# EAGLE board NanoV3.2_panel (EAGLE 9.0.0), part 1 of 3
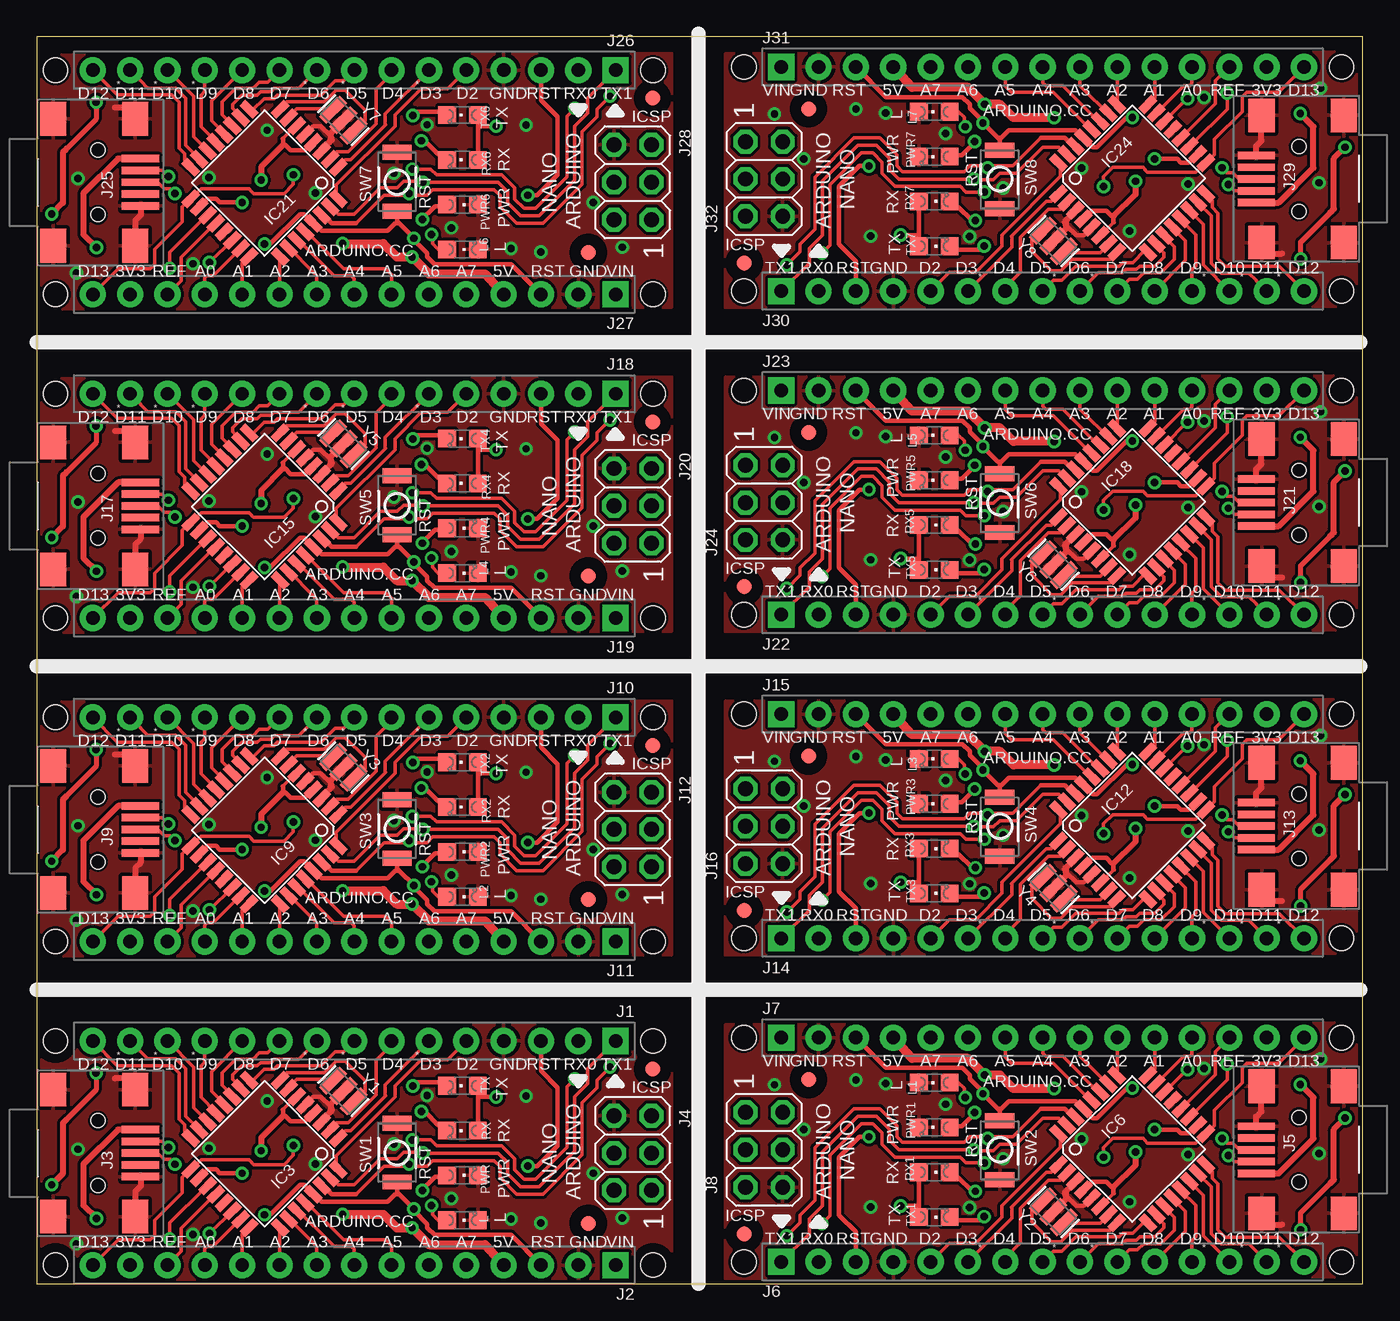
[diagram p0: board, top side]
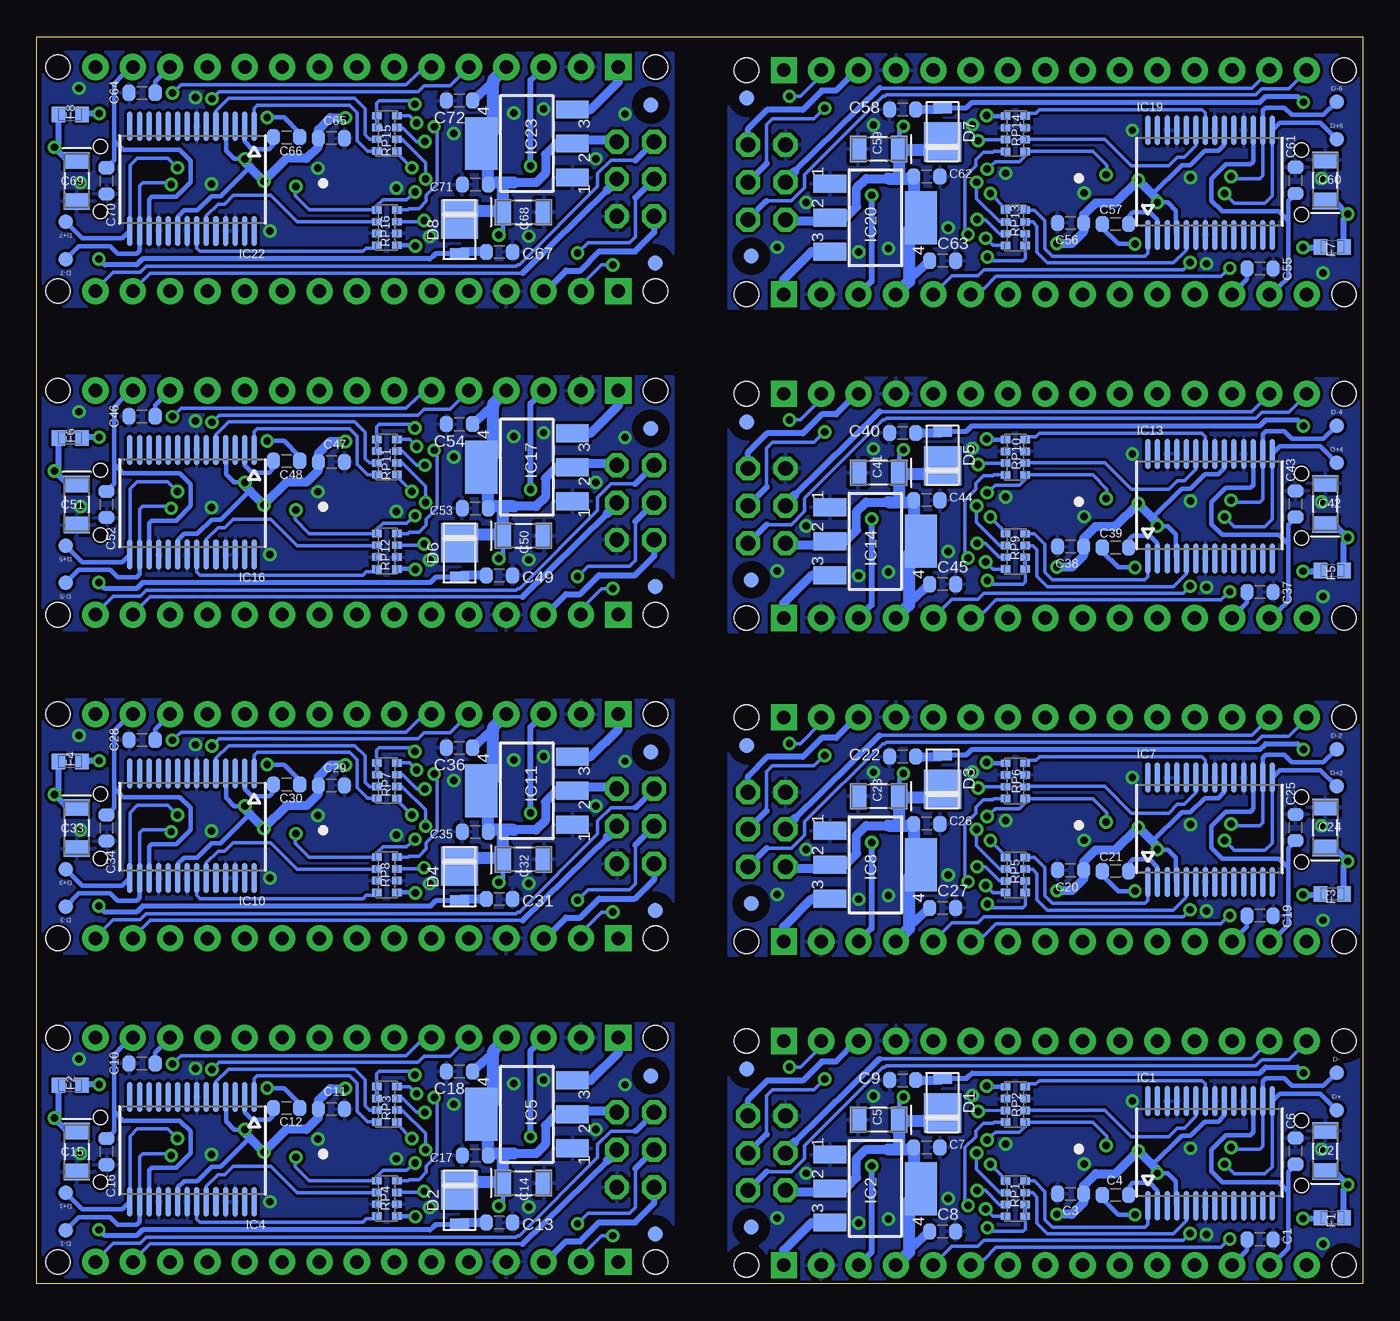
[diagram p1: board, bottom side, seen from below]

Size 90.18 x 84.78 mm. Coordinates in mm from the lower left corner, seen from the top.
Outline: 0,84.78 0,0 90.18,0 90.18,84.78 0,84.78
Copper layers (1*16): Top 0.035mm / dielectric 1.5mm / Bottom 0.035mm
Design rules "default *": minimum track width 10mil, minimum drill 16mil, track to track 8mil, track to pad 8mil, pad to pad 8mil, via to via 8mil, smd to smd 8mil, copper to edge 8mil, drill to drill 8mil, minimum pad ring 12mil, minimum via ring 8mil, stop-mask expansion 0mil, vias tented up to drill 24mil, thermal gap 10mil
Holes 1.65 mm at 1.27,16.51 1.27,1.27 41.91,1.27 41.91,16.51 88.73,1.49 88.73,16.73 48.09,16.73 48.09,1.49 1.27,38.51 1.27,23.27 41.91,23.27 41.91,38.51 88.73,23.49 88.73,38.73 48.09,38.73 48.09,23.49 1.27,60.51 1.27,45.27 41.91,45.27 41.91,60.51 88.73,45.49 88.73,60.73 48.09,60.73 48.09,45.49 1.27,82.51 1.27,67.27 41.91,67.27 41.91,82.51 88.73,67.49 88.73,82.73 48.09,82.73 48.09,67.49
tRestrict: area 0.1,15.4 to 2.4,17.7; area 40.8,0.1 to 43.1,2.4; area 0.1,0.1 to 2.4,2.4; area 40.8,15.4 to 43.1,17.7
bRestrict: area 0.1,0.1 to 2.4,2.4; area 0.1,15.4 to 2.4,17.7; area 40.8,15.4 to 43.1,17.7; area 40.8,0.1 to 43.1,2.4

## Footprints (pad centres in the part's own frame; a part is rotated, then mirrored left to right if it is on the bottom)
C0603-ROUND = smd 0.898 x 1.1: 1 -0.889,0; 2 0.889,0
TAN-A = smd 1.118 x 1.778: 1 0,0; 2 2.794,0
DO220AAL = smd 2.667 x 2.54: P$1 -0.7,0 | smd 0.762 x 1.27: P$2 1.65,0
TP-1.00MM = smd 1 x 1 bottom: X 0,0
0603-1608X90N = smd 0.95 x 1: 1 -0.8,0; 2 0.8,0
SSOP28 = smd 0.381 x 2.032: 1 0,0; 2 0.65,0; 3 1.3,0; 4 1.95,0; 5 2.6,0; 6 3.25,0; 7 3.9,0; 8 4.55,0; 9 5.2,0; 10 5.85,0; 11 6.5,0; 12 7.15,0; 13 7.8,0; 14 8.45,0; 15 8.45,7.112; 16 7.8,7.112; 17 7.15,7.112; 18 6.5,7.112; 19 5.85,7.112; 20 5.2,7.112; 21 4.55,7.112; 22 3.9,7.112; 23 3.25,7.112; 24 2.6,7.112; 25 1.95,7.112; 26 1.3,7.112; 27 0.65,7.112; 28 0,7.112
LINEAR_SOT223 = smd 1.219 x 2.235: 1 -2.311,-3.099; 2 0,-3.099; 3 2.311,-3.099 | smd 3.6 x 2.2: 4 0,3.099
TQFP32-08 = smd 1.27 x 0.559: 1 -4.293,2.8; 2 -4.293,2; 3 -4.293,1.2; 4 -4.293,0.4; 5 -4.293,-0.4; 6 -4.293,-1.2; 7 -4.293,-2; 8 -4.293,-2.8; 17 4.293,-2.8; 18 4.293,-2; 19 4.293,-1.2; 20 4.293,-0.4; 21 4.293,0.4; 22 4.293,1.2; 23 4.293,2; 24 4.293,2.8 | smd 0.559 x 1.27: 9 -2.8,-4.293; 10 -2,-4.293; 11 -1.2,-4.293; 12 -0.4,-4.293; 13 0.4,-4.293; 14 1.2,-4.293; 15 2,-4.293; 16 2.8,-4.293; 25 2.8,4.293; 26 2,4.293; 27 1.2,4.293; 28 0.4,4.293; 29 -0.4,4.293; 30 -1.2,4.293; 31 -2,4.293; 32 -2.8,4.293
HEAD15-NOSS = drill 0.914 pad 1.778 square: 1 0,0 | drill 0.914 pad 1.778: 2 2.54,0; 3 5.08,0; 4 7.62,0; 5 10.16,0; 6 12.7,0; 7 15.24,0; 8 17.78,0; 9 20.32,0; 10 22.86,0; 11 25.4,0; 12 27.94,0; 13 30.48,0; 14 33.02,0; 15 35.56,0
USB-MINI-B_2 = smd 0.508 x 2.54: 1 0,0; 2 0.8,0; 3 1.6,0; 4 2.4,0; 5 3.2,0 | smd 2.286 x 1.778: 6 -2.717,5.948; 7 -2.717,0.36; 8 5.918,0.36; 9 5.918,5.948 | hole 0.95: -0.6,2.9; 3.8,2.9
2X03 = drill 1.016 pad 1.55 octagon: 1 -2.54,-1.27; 2 -2.54,1.27; 3 0,-1.27; 4 0,1.27; 5 2.54,-1.27; 6 2.54,1.27
CHIPLED_0805 = smd 1.2 x 1.2: A 0,-1.05; C 0,1.05
CAY16 = smd 0.5 x 0.65: 1 -1.2,-0.675; 2 -0.4,-0.675; 3 0.4,-0.675; 4 1.2,-0.675; 5 1.2,0.675; 6 0.4,0.675; 7 -0.4,0.675; 8 -1.2,0.675
SMD_157SW = smd 1.016 x 1.981: 1 0,0; 2 4,0
FD-1-1.5 = smd 1.016 x 1.016: P$1 0,0
RESONATOR = smd 0.7 x 2: 1 -1,0; 2 0,0; 3 1,0

## Placement (x,y rotation side)
C1  100nF  [C0603-ROUND]  6.99,3.02 0 bottom
C2  4,7uF_16V  [TAN-A]  2.54,7.62 90 bottom
C3  1uF  [C0603-ROUND]  19.86,6.12 180 bottom
C4  100nF  [C0603-ROUND]  16.81,6.05 0 bottom
C5  4,7uF_16V  [TAN-A]  31.52,11.15 180 bottom
C6  100nF  [C0603-ROUND]  4.57,9.02 270 bottom
C7  1uF  [C0603-ROUND]  29.64,9.27 0 bottom
C8  1uF  [C0603-ROUND]  28.57,3.56 0 bottom
C9  100nF  [C0603-ROUND]  31.29,13.84 180 bottom
C10  100nF  [C0603-ROUND]  83.02,14.98 180 bottom
C11  1uF  [C0603-ROUND]  70.14,11.88 0 bottom
C12  100nF  [C0603-ROUND]  73.19,11.95 180 bottom
C13  100nF  [C0603-ROUND]  58.71,4.16 0 bottom
C14  4,7uF_16V  [TAN-A]  58.48,6.85 0 bottom
C15  4,7uF_16V  [TAN-A]  87.46,10.38 270 bottom
C16  100nF  [C0603-ROUND]  85.43,8.98 90 bottom
C17  1uF  [C0603-ROUND]  60.36,8.73 180 bottom
C18  1uF  [C0603-ROUND]  61.42,14.44 180 bottom
C19  100nF  [C0603-ROUND]  6.99,25.02 0 bottom
C20  1uF  [C0603-ROUND]  19.86,28.12 180 bottom
C21  100nF  [C0603-ROUND]  16.81,28.05 0 bottom
C22  100nF  [C0603-ROUND]  31.29,35.84 180 bottom
C23  4,7uF_16V  [TAN-A]  31.52,33.15 180 bottom
C24  4,7uF_16V  [TAN-A]  2.54,29.62 90 bottom
C25  100nF  [C0603-ROUND]  4.57,31.02 270 bottom
C26  1uF  [C0603-ROUND]  29.64,31.27 0 bottom
C27  1uF  [C0603-ROUND]  28.57,25.56 0 bottom
C28  100nF  [C0603-ROUND]  83.02,36.98 180 bottom
C29  1uF  [C0603-ROUND]  70.14,33.88 0 bottom
C30  100nF  [C0603-ROUND]  73.19,33.95 180 bottom
C31  100nF  [C0603-ROUND]  58.71,26.16 0 bottom
C32  4,7uF_16V  [TAN-A]  58.48,28.85 0 bottom
C33  4,7uF_16V  [TAN-A]  87.46,32.38 270 bottom
C34  100nF  [C0603-ROUND]  85.43,30.98 90 bottom
C35  1uF  [C0603-ROUND]  60.36,30.73 180 bottom
C36  1uF  [C0603-ROUND]  61.42,36.44 180 bottom
C37  100nF  [C0603-ROUND]  6.99,47.02 0 bottom
C38  1uF  [C0603-ROUND]  19.86,50.12 180 bottom
C39  100nF  [C0603-ROUND]  16.81,50.05 0 bottom
C40  100nF  [C0603-ROUND]  31.29,57.84 180 bottom
C41  4,7uF_16V  [TAN-A]  31.52,55.15 180 bottom
C42  4,7uF_16V  [TAN-A]  2.54,51.62 90 bottom
C43  100nF  [C0603-ROUND]  4.57,53.02 270 bottom
C44  1uF  [C0603-ROUND]  29.64,53.27 0 bottom
C45  1uF  [C0603-ROUND]  28.57,47.56 0 bottom
C46  100nF  [C0603-ROUND]  83.02,58.98 180 bottom
C47  1uF  [C0603-ROUND]  70.14,55.88 0 bottom
C48  100nF  [C0603-ROUND]  73.19,55.95 180 bottom
C49  100nF  [C0603-ROUND]  58.71,48.16 0 bottom
C50  4,7uF_16V  [TAN-A]  58.48,50.85 0 bottom
C51  4,7uF_16V  [TAN-A]  87.46,54.38 270 bottom
C52  100nF  [C0603-ROUND]  85.43,52.98 90 bottom
C53  1uF  [C0603-ROUND]  60.36,52.73 180 bottom
C54  1uF  [C0603-ROUND]  61.42,58.44 180 bottom
C55  100nF  [C0603-ROUND]  6.99,69.02 0 bottom
C56  1uF  [C0603-ROUND]  19.86,72.12 180 bottom
C57  100nF  [C0603-ROUND]  16.81,72.05 0 bottom
C58  100nF  [C0603-ROUND]  31.29,79.84 180 bottom
C59  4,7uF_16V  [TAN-A]  31.52,77.15 180 bottom
C60  4,7uF_16V  [TAN-A]  2.54,73.62 90 bottom
C61  100nF  [C0603-ROUND]  4.57,75.02 270 bottom
C62  1uF  [C0603-ROUND]  29.64,75.27 0 bottom
C63  1uF  [C0603-ROUND]  28.57,69.56 0 bottom
C64  100nF  [C0603-ROUND]  83.02,80.98 180 bottom
C65  1uF  [C0603-ROUND]  70.14,77.88 0 bottom
C66  100nF  [C0603-ROUND]  73.19,77.95 180 bottom
C67  100nF  [C0603-ROUND]  58.71,70.16 0 bottom
C68  4,7uF_16V  [TAN-A]  58.48,72.85 0 bottom
C69  4,7uF_16V  [TAN-A]  87.46,76.38 270 bottom
C70  100nF  [C0603-ROUND]  85.43,74.98 90 bottom
C71  1uF  [C0603-ROUND]  60.36,74.73 180 bottom
C72  1uF  [C0603-ROUND]  61.42,80.44 180 bottom
D1  SS1P3L  [DO220AAL]  28.57,12.32 90 bottom
D2  SS1P3L  [DO220AAL]  61.42,5.68 270 bottom
D3  SS1P3L  [DO220AAL]  28.57,34.32 90 bottom
D4  SS1P3L  [DO220AAL]  61.42,27.68 270 bottom
D5  SS1P3L  [DO220AAL]  28.57,56.32 90 bottom
D6  SS1P3L  [DO220AAL]  61.42,49.68 270 bottom
D7  SS1P3L  [DO220AAL]  28.57,78.32 90 bottom
D8  SS1P3L  [DO220AAL]  61.42,71.68 270 bottom
D+  DNP  [TP-1.00MM]  1.78,11.81 0 top
D+1  DNP  [TP-1.00MM]  88.22,6.19 180 top
D+2  DNP  [TP-1.00MM]  1.78,33.81 0 top
D+3  DNP  [TP-1.00MM]  88.22,28.19 180 top
D+4  DNP  [TP-1.00MM]  1.78,55.81 0 top
D+5  DNP  [TP-1.00MM]  88.22,50.19 180 top
D+6  DNP  [TP-1.00MM]  1.78,77.81 0 top
D+7  DNP  [TP-1.00MM]  88.22,72.19 180 top
D-  DNP  [TP-1.00MM]  1.78,14.35 0 top
D-1  DNP  [TP-1.00MM]  88.22,3.65 180 top
D-2  DNP  [TP-1.00MM]  1.78,36.35 0 top
D-3  DNP  [TP-1.00MM]  88.22,25.65 180 top
D-4  DNP  [TP-1.00MM]  1.78,58.35 0 top
D-5  DNP  [TP-1.00MM]  88.22,47.65 180 top
D-6  DNP  [TP-1.00MM]  1.78,80.35 0 top
D-7  DNP  [TP-1.00MM]  88.22,69.65 180 top
F1  MFFSMF050  [0603-1608X90N]  2.08,4.5 180 bottom
F2  MFFSMF050  [0603-1608X90N]  87.92,13.5 0 bottom
F3  MFFSMF050  [0603-1608X90N]  2.08,26.5 180 bottom
F4  MFFSMF050  [0603-1608X90N]  87.92,35.5 0 bottom
F5  MFFSMF050  [0603-1608X90N]  2.08,48.5 180 bottom
F6  MFFSMF050  [0603-1608X90N]  87.92,57.5 0 bottom
F7  MFFSMF050  [0603-1608X90N]  2.08,70.5 180 bottom
F8  MFFSMF050  [0603-1608X90N]  87.92,79.5 0 bottom
IC1  FT232RL  [SSOP28]  14.61,5.31 0 bottom
IC2  LM1117IMPX-5.0  [LINEAR_SOT223]  33.15,6.48 270 bottom
IC3  ATMEGA328P-AU  [TQFP32-08]  15.49,8.84 225 top
IC4  FT232RL  [SSOP28]  75.39,12.69 180 bottom
IC5  LM1117IMPX-5.0  [LINEAR_SOT223]  56.85,11.52 90 bottom
IC6  ATMEGA328P-AU  [TQFP32-08]  74.51,9.16 45 top
IC7  FT232RL  [SSOP28]  14.61,27.31 0 bottom
IC8  LM1117IMPX-5.0  [LINEAR_SOT223]  33.15,28.48 270 bottom
IC9  ATMEGA328P-AU  [TQFP32-08]  15.49,30.84 225 top
IC10  FT232RL  [SSOP28]  75.39,34.69 180 bottom
IC11  LM1117IMPX-5.0  [LINEAR_SOT223]  56.85,33.52 90 bottom
IC12  ATMEGA328P-AU  [TQFP32-08]  74.51,31.16 45 top
IC13  FT232RL  [SSOP28]  14.61,49.31 0 bottom
IC14  LM1117IMPX-5.0  [LINEAR_SOT223]  33.15,50.48 270 bottom
IC15  ATMEGA328P-AU  [TQFP32-08]  15.49,52.84 225 top
IC16  FT232RL  [SSOP28]  75.39,56.69 180 bottom
IC17  LM1117IMPX-5.0  [LINEAR_SOT223]  56.85,55.52 90 bottom
IC18  ATMEGA328P-AU  [TQFP32-08]  74.51,53.16 45 top
IC19  FT232RL  [SSOP28]  14.61,71.31 0 bottom
IC20  LM1117IMPX-5.0  [LINEAR_SOT223]  33.15,72.48 270 bottom
IC21  ATMEGA328P-AU  [TQFP32-08]  15.49,74.84 225 top
IC22  FT232RL  [SSOP28]  75.39,78.69 180 bottom
IC23  LM1117IMPX-5.0  [LINEAR_SOT223]  56.85,77.52 90 bottom
IC24  ATMEGA328P-AU  [TQFP32-08]  74.51,75.16 45 top
J1  XXXX_STRIPNANO  [HEAD15-NOSS]  39.37,16.51 180 top
J2  XXXX_STRIPNANO  [HEAD15-NOSS]  39.37,1.27 180 top
J3  [USB-MINI-B_2]  7.06,7.29 90 top
J4  [2X03]  40.54,8.89 90 top
J5  [USB-MINI-B_2]  82.94,10.71 270 top
J6  XXXX_STRIPNANO  [HEAD15-NOSS]  50.63,1.49 0 top
J7  XXXX_STRIPNANO  [HEAD15-NOSS]  50.63,16.73 0 top
J8  [2X03]  49.46,9.11 270 top
J9  [USB-MINI-B_2]  7.06,29.29 90 top
J10  XXXX_STRIPNANO  [HEAD15-NOSS]  39.37,38.51 180 top
J11  XXXX_STRIPNANO  [HEAD15-NOSS]  39.37,23.27 180 top
J12  [2X03]  40.54,30.89 90 top
J13  [USB-MINI-B_2]  82.94,32.71 270 top
J14  XXXX_STRIPNANO  [HEAD15-NOSS]  50.63,23.49 0 top
J15  XXXX_STRIPNANO  [HEAD15-NOSS]  50.63,38.73 0 top
J16  [2X03]  49.46,31.11 270 top
J17  [USB-MINI-B_2]  7.06,51.29 90 top
J18  XXXX_STRIPNANO  [HEAD15-NOSS]  39.37,60.51 180 top
J19  XXXX_STRIPNANO  [HEAD15-NOSS]  39.37,45.27 180 top
J20  [2X03]  40.54,52.89 90 top
J21  [USB-MINI-B_2]  82.94,54.71 270 top
J22  XXXX_STRIPNANO  [HEAD15-NOSS]  50.63,45.49 0 top
J23  XXXX_STRIPNANO  [HEAD15-NOSS]  50.63,60.73 0 top
J24  [2X03]  49.46,53.11 270 top
J25  [USB-MINI-B_2]  7.06,73.29 90 top
J26  XXXX_STRIPNANO  [HEAD15-NOSS]  39.37,82.51 180 top
J27  XXXX_STRIPNANO  [HEAD15-NOSS]  39.37,67.27 180 top
J28  [2X03]  40.54,74.89 90 top
J29  [USB-MINI-B_2]  82.94,76.71 270 top
J30  XXXX_STRIPNANO  [HEAD15-NOSS]  50.63,67.49 0 top
J31  XXXX_STRIPNANO  [HEAD15-NOSS]  50.63,82.73 0 top
J32  [2X03]  49.46,75.11 270 top
L  Yellow  [CHIPLED_0805]  28.96,4.32 270 top
L1  Yellow  [CHIPLED_0805]  61.04,13.68 90 top
L2  Yellow  [CHIPLED_0805]  28.96,26.32 270 top
L3  Yellow  [CHIPLED_0805]  61.04,35.68 90 top
L4  Yellow  [CHIPLED_0805]  28.96,48.32 270 top
L5  Yellow  [CHIPLED_0805]  61.04,57.68 90 top
L6  Yellow  [CHIPLED_0805]  28.96,70.32 270 top
L7  Yellow  [CHIPLED_0805]  61.04,79.68 90 top
PWR  Green  [CHIPLED_0805]  28.96,7.37 270 top
PWR1  Green  [CHIPLED_0805]  61.04,10.63 90 top
PWR2  Green  [CHIPLED_0805]  28.96,29.37 270 top
PWR3  Green  [CHIPLED_0805]  61.04,32.63 90 top
PWR4  Green  [CHIPLED_0805]  28.96,51.37 270 top
PWR5  Green  [CHIPLED_0805]  61.04,54.63 90 top
PWR6  Green  [CHIPLED_0805]  28.96,73.37 270 top
PWR7  Green  [CHIPLED_0805]  61.04,76.63 90 top
RP1  1K  [CAY16]  23.62,5.79 270 bottom
RP2  1K  [CAY16]  23.62,12.19 90 bottom
RP3  1K  [CAY16]  66.38,12.21 90 bottom
RP4  1K  [CAY16]  66.38,5.81 270 bottom
RP5  1K  [CAY16]  23.62,27.79 270 bottom
RP6  1K  [CAY16]  23.62,34.19 90 bottom
RP7  1K  [CAY16]  66.38,34.21 90 bottom
RP8  1K  [CAY16]  66.38,27.81 270 bottom
RP9  1K  [CAY16]  23.62,49.79 270 bottom
RP10  1K  [CAY16]  23.62,56.19 90 bottom
RP11  1K  [CAY16]  66.38,56.21 90 bottom
RP12  1K  [CAY16]  66.38,49.81 270 bottom
RP13  1K  [CAY16]  23.62,71.79 270 bottom
RP14  1K  [CAY16]  23.62,78.19 90 bottom
RP15  1K  [CAY16]  66.38,78.21 90 bottom
RP16  1K  [CAY16]  66.38,71.81 270 bottom
RX  Red  [CHIPLED_0805]  28.96,10.41 90 top
RX1  Red  [CHIPLED_0805]  61.04,7.59 270 top
RX2  Red  [CHIPLED_0805]  28.96,32.41 90 top
RX3  Red  [CHIPLED_0805]  61.04,29.59 270 top
RX4  Red  [CHIPLED_0805]  28.96,54.41 90 top
RX5  Red  [CHIPLED_0805]  61.04,51.59 270 top
RX6  Red  [CHIPLED_0805]  28.96,76.41 90 top
RX7  Red  [CHIPLED_0805]  61.04,73.59 270 top
SW1  RESET  [SMD_157SW]  24.51,10.92 270 top
SW2  RESET  [SMD_157SW]  65.49,7.08 90 top
SW3  RESET  [SMD_157SW]  24.51,32.92 270 top
SW4  RESET  [SMD_157SW]  65.49,29.08 90 top
SW5  RESET  [SMD_157SW]  24.51,54.92 270 top
SW6  RESET  [SMD_157SW]  65.49,51.08 90 top
SW7  RESET  [SMD_157SW]  24.51,76.92 270 top
SW8  RESET  [SMD_157SW]  65.49,73.08 90 top
TX  Green  [CHIPLED_0805]  28.96,13.46 90 top
TX1  Green  [CHIPLED_0805]  61.04,4.54 270 top
TX2  Green  [CHIPLED_0805]  28.96,35.46 90 top
TX3  Green  [CHIPLED_0805]  61.04,26.54 270 top
TX4  Green  [CHIPLED_0805]  28.96,57.46 90 top
TX5  Green  [CHIPLED_0805]  61.04,48.54 270 top
TX6  Green  [CHIPLED_0805]  28.96,79.46 90 top
TX7  Green  [CHIPLED_0805]  61.04,70.54 270 top
U$1  DNP  [FD-1-1.5]  52.48,13.89 90 top
U$2  DNP  [FD-1-1.5]  48.42,14.14 270 bottom
U$3  DNP  [FD-1-1.5]  48.12,3.4 270 bottom
U$4  DNP  [FD-1-1.5]  37.52,4.11 270 top
U$5  DNP  [FD-1-1.5]  41.88,14.61 0 top
U$6  DNP  [FD-1-1.5]  48.12,3.4 180 top
U$7  DNP  [FD-1-1.5]  37.52,26.11 270 top
U$8  DNP  [FD-1-1.5]  41.58,25.86 90 bottom
U$9  DNP  [FD-1-1.5]  41.88,36.6 90 bottom
U$10  DNP  [FD-1-1.5]  41.88,36.6 0 top
U$11  DNP  [FD-1-1.5]  52.48,35.89 90 top
U$12  DNP  [FD-1-1.5]  48.42,36.14 270 bottom
U$13  DNP  [FD-1-1.5]  48.12,25.39 270 bottom
U$14  DNP  [FD-1-1.5]  48.12,25.39 180 top
U$15  DNP  [FD-1-1.5]  37.52,48.11 270 top
U$16  DNP  [FD-1-1.5]  41.58,47.86 90 bottom
U$17  DNP  [FD-1-1.5]  41.88,58.6 90 bottom
U$18  DNP  [FD-1-1.5]  41.88,58.6 0 top
U$19  DNP  [FD-1-1.5]  52.48,57.89 90 top
U$20  DNP  [FD-1-1.5]  48.42,58.14 270 bottom
U$21  DNP  [FD-1-1.5]  48.12,47.4 270 bottom
U$22  DNP  [FD-1-1.5]  48.12,47.4 180 top
U$23  DNP  [FD-1-1.5]  37.52,70.11 270 top
U$24  DNP  [FD-1-1.5]  41.58,69.86 90 bottom
U$25  DNP  [FD-1-1.5]  41.88,80.61 90 bottom
U$26  DNP  [FD-1-1.5]  41.88,80.61 0 top
U$27  DNP  [FD-1-1.5]  52.48,79.89 90 top
U$28  DNP  [FD-1-1.5]  48.42,80.14 270 bottom
U$29  DNP  [FD-1-1.5]  48.12,69.39 270 bottom
U$30  DNP  [FD-1-1.5]  48.12,69.39 180 top
U$53  DNP  [FD-1-1.5]  41.58,3.86 90 bottom
U$54  DNP  [FD-1-1.5]  41.88,14.61 90 bottom
Y1  16MHz  [RESONATOR]  20.85,13.11 315 top
Y2  16MHz  [RESONATOR]  69.15,4.89 135 top
Y3  16MHz  [RESONATOR]  20.85,35.11 315 top
Y4  16MHz  [RESONATOR]  69.15,26.89 135 top
Y5  16MHz  [RESONATOR]  20.85,57.11 315 top
Y6  16MHz  [RESONATOR]  69.15,48.89 135 top
Y7  16MHz  [RESONATOR]  20.85,79.11 315 top
Y8  16MHz  [RESONATOR]  69.15,70.89 135 top

## Library data of the parts
C1 C4 C6 C9 C10 C12 C13 C16 C19 C21 C22 C25 C28 C30 C31 C34 C37 C39 C40 C43 C46 C48 C49 C52 C55 C57 C58 C61 C64 C66 C67 C70 = Condensatori; CASE: 0603; MONTHLY_USAGE: _____; PART_NUMBER: cl10b104kbnc; PRICE: _____; SUPPLIER: _____; TYPE: Condensatori
C2 C5 C14 C15 C23 C24 C32 C33 C41 C42 C50 C51 C59 C60 C68 C69 = Condensatori; CASE: Case_A_(1206); MONTHLY_USAGE: _____; PART_NUMBER: TAJA475MO16RNJ; PRICE: _____; SUPPLIER: _____; TYPE: Condensatori
C3 C7 C8 C11 C17 C18 C20 C26 C27 C29 C35 C36 C38 C44 C45 C47 C53 C54 C56 C62 C63 C65 C71 C72 = Condensatori; CASE: 0603; MONTHLY_USAGE: _____; PART_NUMBER: 1uF_0603/GRM188R61E105KA12D; PRICE: _____; SUPPLIER: _____; TYPE: Condensatori
D1-D8 = Diodi; CASE: SMP; MONTHLY_USAGE: _____; PART_NUMBER: SS1P3L-M3/84A; PRICE: _____; SUPPLIER: _____; TYPE: Diodi
D+ D+1-D+7 D- D-1-D-7 U$1-U$30 U$53 U$54 = Arduino-utility; DATASHEET: DNP; DISTRIBUTOR-LINK: DNP; DISTRIBUTOR-PN: DNP; MANUFACTURER: DNP; MANUFACTURER-PN: DNP
F1-F8 = Arduino-rcl; DATASHEET: http://www.bourns.com/docs/Product-Datasheets/mffsmf.pdf; DISTRIBUTOR-LINK: http://www.digikey.com/product-detail/en/bourns-inc/MF-FSMF050X-2/MF-FSMF050X-2CT-ND/2039389; DISTRIBUTOR-PN: MF-FSMF050X-2CT-ND; MANUFACTURER: Bourns Inc; MANUFACTURER-PN: MF-FSMF050X-2
IC1 IC4 IC7 IC10 IC13 IC16 IC19 IC22 = IntegratedCircuits; CASE: SSOP28; MONTHLY_USAGE: _____; PART_NUMBER: FT232RL; PRICE: _____; SUPPLIER: _____; TYPE: Circuito_Integrato
IC2 IC5 IC8 IC11 IC14 IC17 IC20 IC23 = IntegratedCircuits; CASE: SOT223; MONTHLY_USAGE: _____; PART_NUMBER: LM1117IMPX-5.0; PRICE: _____; SUPPLIER: _____; TYPE: Circuito_Integrato
IC3 IC6 IC9 IC12 IC15 IC18 IC21 IC24 = IntegratedCircuits; CASE: TQFP32_7x7; MONTHLY_USAGE: _____; PART_NUMBER: ATMEGA328P-AU; PRICE: _____; SUPPLIER: _____; TYPE: Circuito_Integrato
J1 J2 J6 J7 J10 J11 J14 J15 J18 J19 J22 J23 J26 J27 J30 J31 = Connettori; VALUE: Strip15pin
J3 J5 J9 J13 J17 J21 J25 J29 = Connettori; MONTHLY_USAGE: _____; PART_NUMBER: 14850; PRICE: _____; SUPPLIER: _____; TYPE: Connettori; VALUE: USB-mini-90 -SMD
J4 J8 J12 J16 J20 J24 J28 J32 = Connettori; MONTHLY_USAGE: _____; PART_NUMBER: PH254-203DF118A00V; PRICE: _____; SUPPLIER: _____; TYPE: Connettori; VALUE: ICSP
L L1-L7 = Opto; MONTHLY_USAGE: _____; PART_NUMBER: KPT-2012YC; PRICE: _____; SUPPLIER: _____; TYPE: Opto
PWR PWR1-PWR7 TX TX1-TX7 = Opto; MONTHLY_USAGE: _____; PART_NUMBER: KPT-2012SGC; PRICE: _____; SUPPLIER: _____; TYPE: Opto
RP1-RP16 = Resistenze; CASE: SMD_3,2x1,6; MONTHLY_USAGE: _____; PART_NUMBER: 064R_1K_/_CAY16-102J4LF; PRICE: _____; SUPPLIER: _____; TYPE: Resistenze
RX RX1-RX7 = Opto; MONTHLY_USAGE: _____; PART_NUMBER: KTP-2012SURCK; PRICE: _____; SUPPLIER: _____; TYPE: Opto
SW1-SW8 = Switches; MONTHLY_USAGE: _____; PART_NUMBER: IT-1185AP1C-160G-G_T&R; PRICE: _____; SUPPLIER: _____; TYPE: Switches; VALUE: 157SW
Y1-Y8 = Cristalli; MONTHLY_USAGE: _____; PART_NUMBER: CSTCE16M0V53-R0; PRICE: _____; SUPPLIER: _____; TYPE: Cristalli; VALUE: CSTCE16M0V53-R0

## Nets
3V1: C16.2 IC4.17 J7.14
3V2: C25.2 IC7.17 J11.14
3V3: C6.2 IC1.17 J2.14
3V4: C34.2 IC10.17 J15.14
3V5: C43.2 IC13.17 J19.14
3V6: C52.2 IC16.17 J23.14
3V7: C61.2 IC19.17 J27.14
3V8: C70.2 IC22.17 J31.14
+5V: C3.1 C5.1 C7.1 C8.1 D1.P$1 IC1.4 IC1.20 IC2.2 IC2.4 IC3.4 IC3.6 IC3.18 J2.4 J4.2 RP1.5 RP1.6 RX.A TX.A
+5V1: C11.1 C14.1 C17.1 C18.1 D2.P$1 IC4.4 IC4.20 IC5.2 IC5.4 IC6.4 IC6.6 IC6.18 J7.4 J8.2 RP3.5 RP3.6 RX1.A TX1.A
+5V2: C20.1 C23.1 C26.1 C27.1 D3.P$1 IC7.4 IC7.20 IC8.2 IC8.4 IC9.4 IC9.6 IC9.18 J11.4 J12.2 RP5.5 RP5.6 RX2.A TX2.A
+5V3: C29.1 C32.1 C35.1 C36.1 D4.P$1 IC10.4 IC10.20 IC11.2 IC11.4 IC12.4 IC12.6 IC12.18 J15.4 J16.2 RP7.5 RP7.6 RX3.A TX3.A
+5V4: C38.1 C41.1 C44.1 C45.1 D5.P$1 IC13.4 IC13.20 IC14.2 IC14.4 IC15.4 IC15.6 IC15.18 J19.4 J20.2 RP9.5 RP9.6 RX4.A TX4.A
+5V5: C47.1 C50.1 C53.1 C54.1 D6.P$1 IC16.4 IC16.20 IC17.2 IC17.4 IC18.4 IC18.6 IC18.18 J23.4 J24.2 RP11.5 RP11.6 RX5.A TX5.A
+5V6: C56.1 C59.1 C62.1 C63.1 D7.P$1 IC19.4 IC19.20 IC20.2 IC20.4 IC21.4 IC21.6 IC21.18 J27.4 J28.2 RP13.5 RP13.6 RX6.A TX6.A
+5V7: C65.1 C68.1 C71.1 C72.1 D8.P$1 IC22.4 IC22.20 IC23.2 IC23.4 IC24.4 IC24.6 IC24.18 J31.4 J32.2 RP15.5 RP15.6 RX7.A TX7.A
A0: IC3.23 J2.12
A1: IC3.24 J2.11
A2: IC3.25 J2.10
A3: IC3.26 J2.9
A4: IC3.27 J2.8
A5: IC3.28 J2.7
A6: IC3.19 J2.6
A7: IC3.22 J2.5
A8: IC6.26 J7.9
A9: IC6.25 J7.10
A10: IC6.24 J7.11
A11: IC6.23 J7.12
A12: IC6.27 J7.8
A13: IC6.28 J7.7
A14: IC6.19 J7.6
A15: IC6.22 J7.5
A16: IC9.26 J11.9
A17: IC9.25 J11.10
A18: IC9.24 J11.11
A19: IC9.23 J11.12
A20: IC9.27 J11.8
A21: IC9.28 J11.7
A22: IC9.19 J11.6
A23: IC9.22 J11.5
A24: IC12.26 J15.9
A25: IC12.25 J15.10
A26: IC12.24 J15.11
A27: IC12.23 J15.12
A28: IC12.27 J15.8
A29: IC12.28 J15.7
A30: IC12.19 J15.6
A31: IC12.22 J15.5
A32: IC15.26 J19.9
A33: IC15.25 J19.10
A34: IC15.24 J19.11
A35: IC15.23 J19.12
A36: IC15.27 J19.8
A37: IC15.28 J19.7
A38: IC15.19 J19.6
A39: IC15.22 J19.5
A40: IC18.26 J23.9
A41: IC18.25 J23.10
A42: IC18.24 J23.11
A43: IC18.23 J23.12
A44: IC18.27 J23.8
A45: IC18.28 J23.7
A46: IC18.19 J23.6
A47: IC18.22 J23.5
A48: IC21.26 J27.9
A49: IC21.25 J27.10
A50: IC21.24 J27.11
A51: IC21.23 J27.12
A52: IC21.27 J27.8
A53: IC21.28 J27.7
A54: IC21.19 J27.6
A55: IC21.22 J27.5
A56: IC24.26 J31.9
A57: IC24.25 J31.10
A58: IC24.24 J31.11
A59: IC24.23 J31.12
A60: IC24.27 J31.8
A61: IC24.28 J31.7
A62: IC24.19 J31.6
A63: IC24.22 J31.5
AREF: C1.1 IC3.20 J2.13
AREF1: C10.1 IC6.20 J7.13
AREF2: C19.1 IC9.20 J11.13
AREF3: C28.1 IC12.20 J15.13
AREF4: C37.1 IC15.20 J19.13
AREF5: C46.1 IC18.20 J23.13
AREF6: C55.1 IC21.20 J27.13
AREF7: C64.1 IC24.20 J31.13
COM: C1.2 C2.2 C3.2 C5.2 C6.1 C7.2 C8.2 C9.2 IC1.7 IC1.18 IC1.21 IC1.25 IC1.26 IC2.1 IC3.3 IC3.5 IC3.21 J1.4 J2.2 J3.1 J3.6 J3.7 J3.8 J3.9 J4.6 L.C PWR.C RP2.3 RP2.6 SW1.1 Y1.2
COM1: C10.2 C11.2 C13.2 C14.2 C15.2 C16.1 C17.2 C18.2 IC4.7 IC4.18 IC4.21 IC4.25 IC4.26 IC5.1 IC6.3 IC6.5 IC6.21 J5.1 J5.6 J5.7 J5.8 J5.9 J6.4 J7.2 J8.6 L1.C PWR1.C RP4.3 RP4.6 SW2.1 Y2.2
COM2: C19.2 C20.2 C22.2 C23.2 C24.2 C25.1 C26.2 C27.2 IC7.7 IC7.18 IC7.21 IC7.25 IC7.26 IC8.1 IC9.3 IC9.5 IC9.21 J9.1 J9.6 J9.7 J9.8 J9.9 J10.4 J11.2 J12.6 L2.C PWR2.C RP6.3 RP6.6 SW3.1 Y3.2
COM3: C28.2 C29.2 C31.2 C32.2 C33.2 C34.1 C35.2 C36.2 IC10.7 IC10.18 IC10.21 IC10.25 IC10.26 IC11.1 IC12.3 IC12.5 IC12.21 J13.1 J13.6 J13.7 J13.8 J13.9 J14.4 J15.2 J16.6 L3.C PWR3.C RP8.3 RP8.6 SW4.1 Y4.2
COM4: C37.2 C38.2 C40.2 C41.2 C42.2 C43.1 C44.2 C45.2 IC13.7 IC13.18 IC13.21 IC13.25 IC13.26 IC14.1 IC15.3 IC15.5 IC15.21 J17.1 J17.6 J17.7 J17.8 J17.9 J18.4 J19.2 J20.6 L4.C PWR4.C RP10.3 RP10.6 SW5.1 Y5.2
COM5: C46.2 C47.2 C49.2 C50.2 C51.2 C52.1 C53.2 C54.2 IC16.7 IC16.18 IC16.21 IC16.25 IC16.26 IC17.1 IC18.3 IC18.5 IC18.21 J21.1 J21.6 J21.7 J21.8 J21.9 J22.4 J23.2 J24.6 L5.C PWR5.C RP12.3 RP12.6 SW6.1 Y6.2
COM6: C55.2 C56.2 C58.2 C59.2 C60.2 C61.1 C62.2 C63.2 IC19.7 IC19.18 IC19.21 IC19.25 IC19.26 IC20.1 IC21.3 IC21.5 IC21.21 J25.1 J25.6 J25.7 J25.8 J25.9 J26.4 J27.2 J28.6 L6.C PWR6.C RP14.3 RP14.6 SW7.1 Y7.2
COM7: C64.2 C65.2 C67.2 C68.2 C69.2 C70.1 C71.2 C72.2 IC22.7 IC22.18 IC22.21 IC22.25 IC22.26 IC23.1 IC24.3 IC24.5 IC24.21 J29.1 J29.6 J29.7 J29.8 J29.9 J30.4 J31.2 J32.6 L7.C PWR7.C RP16.3 RP16.6 SW8.1 Y8.2
D0/RX: IC3.30 J1.2 RP1.1
D0/RX1: IC6.30 J6.2 RP3.1
D0/RX2: IC9.30 J10.2 RP5.1
D0/RX3: IC12.30 J14.2 RP7.1
D0/RX4: IC15.30 J18.2 RP9.1
D0/RX5: IC18.30 J22.2 RP11.1
D0/RX6: IC21.30 J26.2 RP13.1
D0/RX7: IC24.30 J30.2 RP15.1
D1: IC6.9 J6.8
D1/TX: IC3.31 J1.1 RP1.2
D1/TX1: IC6.31 J6.1 RP3.2
D1/TX2: IC9.31 J10.1 RP5.2
D1/TX3: IC12.31 J14.1 RP7.2
D1/TX4: IC15.31 J18.1 RP9.2
D1/TX5: IC18.31 J22.1 RP11.2
D1/TX6: IC21.31 J26.1 RP13.2
D1/TX7: IC24.31 J30.1 RP15.2
D2: IC3.32 J1.5
D3: IC3.1 J1.6
D4: IC3.2 J1.7
D5: IC3.9 J1.8
D6: IC3.10 J1.9
D7: IC3.11 J1.10
D8: IC3.12 J1.11
D9: IC3.13 J1.12
D10: IC3.14 J1.13
D11: IC6.2 J6.7
D11/MOSI: IC3.15 J1.14 J4.4
D11/MOSI1: IC6.15 J6.14 J8.4
D11/MOSI2: IC9.15 J10.14 J12.4
D11/MOSI3: IC12.15 J14.14 J16.4
D11/MOSI4: IC15.15 J18.14 J20.4
D11/MOSI5: IC18.15 J22.14 J24.4
D11/MOSI6: IC21.15 J26.14 J28.4
D11/MOSI7: IC24.15 J30.14 J32.4
D12: IC6.1 J6.6
D12/MISO: IC3.16 J1.15 J4.1
D12/MISO1: IC6.16 J6.15 J8.1
D12/MISO2: IC9.16 J10.15 J12.1
D12/MISO3: IC12.16 J14.15 J16.1
D12/MISO4: IC15.16 J18.15 J20.1
D12/MISO5: IC18.16 J22.15 J24.1
D12/MISO6: IC21.16 J26.15 J28.1
D12/MISO7: IC24.16 J30.15 J32.1
D13: IC6.32 J6.5
D13/SCK: IC3.17 J2.15 J4.3 RP2.1
D13/SCK1: IC6.17 J7.15 J8.3 RP4.1
D13/SCK2: IC9.17 J11.15 J12.3 RP6.1
D13/SCK3: IC12.17 J15.15 J16.3 RP8.1
D13/SCK4: IC15.17 J19.15 J20.3 RP10.1
D13/SCK5: IC18.17 J23.15 J24.3 RP12.1
D13/SCK6: IC21.17 J27.15 J28.3 RP14.1
D13/SCK7: IC24.17 J31.15 J32.3 RP16.1
D14: IC6.10 J6.9
D15: IC6.11 J6.10
D16: IC6.12 J6.11
D17: IC6.13 J6.12
D18: IC6.14 J6.13
D19: IC9.9 J10.8
D20: IC9.2 J10.7
D21: IC9.1 J10.6
D22: IC9.32 J10.5
D23: IC9.10 J10.9
D24: IC9.11 J10.10
D25: IC9.12 J10.11
D26: IC9.13 J10.12
D27: IC9.14 J10.13
D28: IC12.9 J14.8
D29: IC12.2 J14.7
D30: IC12.1 J14.6
D31: IC12.32 J14.5
D32: IC12.10 J14.9
D33: IC12.11 J14.10
D34: IC12.12 J14.11
D35: IC12.13 J14.12
D36: IC12.14 J14.13
D37: IC15.9 J18.8
D38: IC15.2 J18.7
D39: IC15.1 J18.6
D40: IC15.32 J18.5
D41: IC15.10 J18.9
D42: IC15.11 J18.10
D43: IC15.12 J18.11
D44: IC15.13 J18.12
D45: IC15.14 J18.13
D46: IC18.9 J22.8
D47: IC18.2 J22.7
D48: IC18.1 J22.6
D49: IC18.32 J22.5
D50: IC18.10 J22.9
D51: IC18.11 J22.10
D52: IC18.12 J22.11
D53: IC18.13 J22.12
D54: IC18.14 J22.13
D55: IC21.9 J26.8
D56: IC21.2 J26.7
D57: IC21.1 J26.6
D58: IC21.32 J26.5
D59: IC21.10 J26.9
D60: IC21.11 J26.10
D61: IC21.12 J26.11
D62: IC21.13 J26.12
D63: IC21.14 J26.13
D64: IC24.9 J30.8
D65: IC24.2 J30.7
D66: IC24.1 J30.6
D67: IC24.32 J30.5
D68: IC24.10 J30.9
D69: IC24.11 J30.10
D70: IC24.12 J30.11
D71: IC24.13 J30.12
D72: IC24.14 J30.13
N$1: IC3.8 Y1.3
N$2: IC3.7 Y1.1
N$3: PWR.A RP1.3
N$4: C4.2 IC1.2
N$5: D+.X IC1.15 J3.3
N$6: D-.X IC1.16 J3.4
N$7: L.A RP2.8
N$8: IC1.23 RP2.2
N$9: IC1.22 RP2.4
N$10: C12.2 IC4.2
N$11: RP2.5 TX.C
N$12: D+1.X IC4.15 J5.3
N$13: D-1.X IC4.16 J5.4
N$14: PWR1.A RP3.3
N$15: IC4.23 RP4.2
N$16: IC4.22 RP4.4
N$17: IC6.7 Y2.1
N$18: IC6.8 Y2.3
N$19: L1.A RP4.8
N$20: RP4.5 TX1.C
N$21: F2.2 J5.5
N$22: RP4.7 RX1.C
N$23: C21.2 IC7.2
N$24: D+2.X IC7.15 J9.3
N$25: D-2.X IC7.16 J9.4
N$26: F1.2 J3.5
N$27: PWR2.A RP5.3
N$28: IC7.23 RP6.2
N$29: RP2.7 RX.C
N$30: IC7.22 RP6.4
N$31: IC9.7 Y3.1
N$32: IC9.8 Y3.3
N$33: L2.A RP6.8
N$34: RP6.5 TX2.C
N$35: F3.2 J9.5
N$36: RP6.7 RX2.C
N$37: C30.2 IC10.2
N$38: D+3.X IC10.15 J13.3
N$39: D-3.X IC10.16 J13.4
N$40: PWR3.A RP7.3
N$41: IC10.23 RP8.2
N$42: IC10.22 RP8.4
N$43: IC12.7 Y4.1
N$44: IC12.8 Y4.3
N$45: L3.A RP8.8
N$46: RP8.5 TX3.C
N$47: F4.2 J13.5
N$48: RP8.7 RX3.C
N$49: C39.2 IC13.2
N$50: D+4.X IC13.15 J17.3
N$51: D-4.X IC13.16 J17.4
N$52: PWR4.A RP9.3
N$53: IC13.23 RP10.2
N$54: IC13.22 RP10.4
N$55: IC15.7 Y5.1
N$56: IC15.8 Y5.3
N$57: L4.A RP10.8
N$58: RP10.5 TX4.C
N$59: F5.2 J17.5
N$60: RP10.7 RX4.C
N$61: C48.2 IC16.2
N$62: D+5.X IC16.15 J21.3
N$63: D-5.X IC16.16 J21.4
N$64: PWR5.A RP11.3
N$65: IC16.23 RP12.2
N$66: IC16.22 RP12.4
N$67: IC18.7 Y6.1
N$68: IC18.8 Y6.3
N$69: L5.A RP12.8
N$70: RP12.5 TX5.C
N$71: F6.2 J21.5
N$72: RP12.7 RX5.C
N$73: C57.2 IC19.2
N$74: D+6.X IC19.15 J25.3
N$75: D-6.X IC19.16 J25.4
N$76: PWR6.A RP13.3
N$77: IC19.23 RP14.2
N$78: IC19.22 RP14.4
N$79: IC21.7 Y7.1
N$80: IC21.8 Y7.3
N$81: L6.A RP14.8
N$82: RP14.5 TX6.C
N$83: F7.2 J25.5
N$84: RP14.7 RX6.C
N$85: C66.2 IC22.2
N$86: D+7.X IC22.15 J29.3
N$87: D-7.X IC22.16 J29.4
N$88: PWR7.A RP15.3
N$89: IC22.23 RP16.2
N$90: IC22.22 RP16.4
N$91: IC24.7 Y8.1
N$92: IC24.8 Y8.3
N$93: L7.A RP16.8
N$94: RP16.5 TX7.C
N$95: F8.2 J29.5
N$96: RP16.7 RX7.C
RESET: C4.1 IC3.29 J1.3 J2.3 J4.5 RP1.4 SW1.2
RESET1: C12.1 IC6.29 J6.3 J7.3 J8.5 RP3.4 SW2.2
RESET2: C21.1 IC9.29 J10.3 J11.3 J12.5 RP5.4 SW3.2
RESET3: C30.1 IC12.29 J14.3 J15.3 J16.5 RP7.4 SW4.2
RESET4: C39.1 IC15.29 J18.3 J19.3 J20.5 RP9.4 SW5.2
RESET5: C48.1 IC18.29 J22.3 J23.3 J24.5 RP11.4 SW6.2
RESET6: C57.1 IC21.29 J26.3 J27.3 J28.5 RP13.4 SW7.2
RESET7: C66.1 IC24.29 J30.3 J31.3 J32.5 RP15.4 SW8.2
RX: IC1.1 RP1.8
RX1: IC4.1 RP3.8
RX2: IC7.1 RP5.8
RX3: IC10.1 RP7.8
RX4: IC13.1 RP9.8
RX5: IC16.1 RP11.8
RX6: IC19.1 RP13.8
RX7: IC22.1 RP15.8
TX: IC1.5 RP1.7
TX1: IC4.5 RP3.7
TX2: IC7.5 RP5.7
TX3: IC10.5 RP7.7
TX4: IC13.5 RP9.7
TX5: IC16.5 RP11.7
TX6: IC19.5 RP13.7
TX7: IC22.5 RP15.7
VIN: IC2.3 J2.1
VIN1: IC5.3 J7.1
VIN2: IC8.3 J11.1
VIN3: IC11.3 J15.1
VIN4: IC14.3 J19.1
VIN5: IC17.3 J23.1
VIN6: IC20.3 J27.1
VIN7: IC23.3 J31.1
VUSB: C2.1 C9.1 D1.P$2 F1.1
VUSB1: C13.1 C15.1 D2.P$2 F2.1
VUSB2: C22.1 C24.1 D3.P$2 F3.1
VUSB3: C31.1 C33.1 D4.P$2 F4.1
VUSB4: C40.1 C42.1 D5.P$2 F5.1
VUSB5: C49.1 C51.1 D6.P$2 F6.1
VUSB6: C58.1 C60.1 D7.P$2 F7.1
VUSB7: C67.1 C69.1 D8.P$2 F8.1

## Tracks (layer width: path | path; a pad name or v marks a point on that pad's centre or on a via)
3V1
  Bottom 0.305: IC4.17 82.55,7.71 82.37,7.89 80.7,7.89 79.71,8.88 79.71,10.36 80.45,11.09 84.28,11.09 84.92,11.73 | 85.4,9.85 C16.2 84.92,10.38 84.92,11.73 | J7.14 84.16,16.22 84.28,16.22 84.92,15.59 84.92,11.73
3V2
  Bottom 0.305: IC7.17 7.46,32.29 7.63,32.11 9.3,32.11 10.29,31.12 10.29,29.64 9.55,28.91 5.71,28.91 5.08,28.27 | 4.6,30.15 C25.2 5.08,29.62 5.08,28.27 | J11.14 5.84,23.78 5.71,23.78 5.08,24.41 5.08,28.27
3V3
  Bottom 0.305: IC1.17 7.46,10.29 7.63,10.11 9.3,10.11 10.29,9.12 10.29,7.64 9.55,6.91 5.71,6.91 5.08,6.27 | 4.6,8.15 C6.2 5.08,7.62 5.08,6.27 | J2.14 5.84,1.78 5.71,1.78 5.08,2.41 5.08,6.27
3V4
  Bottom 0.305: IC10.17 82.55,29.71 82.37,29.89 80.7,29.89 79.71,30.88 79.71,32.35 80.45,33.09 84.28,33.09 84.92,33.73 | 85.4,31.85 C34.2 84.92,32.38 84.92,33.73 | J15.14 84.16,38.22 84.28,38.22 84.92,37.59 84.92,33.73
3V5
  Bottom 0.305: IC13.17 7.46,54.29 7.63,54.11 9.3,54.11 10.29,53.12 10.29,51.65 9.55,50.91 5.71,50.91 5.08,50.27 | 4.6,52.15 C43.2 5.08,51.62 5.08,50.27 | J19.14 5.84,45.78 5.71,45.78 5.08,46.41 5.08,50.27
3V6
  Bottom 0.305: IC16.17 82.55,51.71 82.37,51.89 80.7,51.89 79.71,52.88 79.71,54.35 80.45,55.09 84.28,55.09 84.92,55.73 | 85.4,53.85 C52.2 84.92,54.38 84.92,55.73 | J23.14 84.16,60.22 84.28,60.22 84.92,59.59 84.92,55.73
3V7
  Bottom 0.305: IC19.17 7.46,76.29 7.63,76.11 9.3,76.11 10.29,75.12 10.29,73.64 9.55,72.91 5.71,72.91 5.08,72.27 | 4.6,74.15 C61.2 5.08,73.62 5.08,72.27 | J27.14 5.84,67.78 5.71,67.78 5.08,68.41 5.08,72.27
3V8
  Bottom 0.305: IC22.17 82.55,73.71 82.37,73.89 80.7,73.89 79.71,74.88 79.71,76.36 80.45,77.09 84.28,77.09 84.92,77.73 | 85.4,75.85 C70.2 84.92,76.38 84.92,77.73 | J31.14 84.16,82.22 84.28,82.22 84.92,81.59 84.92,77.73
+5V  (via drill 0.5, 0.5 pad 0.81)
  Top 0.254: 16.74,11.84 17.48,12.58 | v15.27,9.04 15.14,8.97
  Top 0.305: IC3.6 17.49,12.58 17.48,12.58 | IC3.4 18.62,11.46 18.21,11.05 17.27,11.05 16.89,11.43 16.76,11.43 16.76,11.81 16.74,11.84 | TX.A 30.01,12.7 | 30.01,12.7 RX.A | v31.24,12.7 30.01,12.7 | IC3.18 11.08,7.22 11.63,7.77 12.19,7.77 12.45,7.52 v13.97,7.52
  Top 0.406: 16.76,11.43 15.27,9.93 v15.27,9.04
  Top 0.61: v20.8,4.72 23.57,4.72 24.49,3.81 v25.53,3.81 26.67,2.67 30.48,2.67 J2.4
  Bottom 0.254: v15.27,9.04 15.16,9.2 | 12.7,5.38 IC1.4 | v25.53,3.81 25.27,3.56 23.11,3.56 22.95,3.72 RP1.5 RP1.6
  Bottom 0.305: 29.34,4.95 29.34,5.77 IC2.4 | IC1.20 9.4,11.45 9.83,11.02 10.74,11.02 11.71,10.06 12.32,10.06 14.3,8.08 | C5.1 31.52,12.42 v31.24,12.7 | 13.97,7.8 v13.97,7.52 13.26,7.52 12.7,6.96 12.7,5.38 | v15.27,9.04 15.21,9.09 15.21,9.17
  Bottom 0.406: IC2.2 36.37,6.35 | 30.61,7.37 30.61,7.04 30.45,6.88 | 30.45,6.88 IC2.4 | 30.12,7.21 30.45,6.88 | 31.42,11.05 C5.1
  Bottom 0.61: 15.27,8.99 v15.27,9.04 | 36.37,6.35 36.96,6.35 37.08,6.22 38.73,6.22 38.86,6.35 J4.2 | IC2.2 35.18,6.48 34.42,7.24 34.42,8.51 33.78,9.14 32.26,9.14 | D1.P$1 28.77,11.62 29.34,11.05 | C8.1 30.73,2.41 30.86,2.41 | 20.8,4.75 v20.8,4.72 19.79,4.72 18.97,5.54 C3.1 18.97,6.68 18.16,7.49 16.82,7.49 v15.27,9.04 | v13.97,7.52 13.97,7.75 14.3,8.08 v15.27,9.04
  Bottom 0.813: IC2.4 30.86,5.66 30.86,2.41 30.86,2.16 J2.4 | 29.34,11.05 31.42,11.05 | 30.12,7.21 30.53,7.37 C7.1 30.66,9.14 31.5,9.14 | 32.26,9.14 31.5,9.14 | 31.5,9.14 31.5,11.12 C5.1
+5V1  (via drill 0.5, 0.5 pad 0.81)
  Top 0.254: 73.26,6.16 72.52,5.42 | v74.73,8.96 74.86,9.03
  Top 0.305: IC6.6 72.51,5.42 72.52,5.42 | IC6.4 71.38,6.54 71.79,6.95 72.73,6.95 73.11,6.57 73.24,6.57 73.24,6.19 73.26,6.16 | TX1.A 59.99,5.3 | 59.99,5.3 RX1.A | v58.76,5.3 59.99,5.3 | IC6.18 78.92,10.78 78.37,10.23 77.81,10.23 77.55,10.48 v76.03,10.48
  Top 0.406: 73.24,6.57 74.73,8.07 v74.73,8.96
  Top 0.61: v69.2,13.28 66.43,13.28 65.51,14.19 v64.47,14.19 63.33,15.33 59.52,15.33 J7.4
  Bottom 0.254: v74.73,8.96 74.84,8.8 | 77.3,12.62 IC4.4 | v64.47,14.19 64.73,14.44 66.89,14.44 67.05,14.28 RP3.5 RP3.6
  Bottom 0.305: 60.66,13.05 60.66,12.23 IC5.4 | IC4.20 80.59,6.55 80.17,6.98 79.26,6.98 78.29,7.94 77.68,7.94 75.7,9.92 | C14.1 58.48,5.58 v58.76,5.3 | 76.03,10.2 v76.03,10.48 76.74,10.48 77.3,11.04 77.3,12.62 | v74.73,8.96 74.78,8.91 74.78,8.83
  Bottom 0.406: IC5.2 53.63,11.65 | 59.39,10.63 59.39,10.96 59.55,11.12 | 59.55,11.12 IC5.4 | 59.88,10.79 59.55,11.12 | 58.58,6.95 C14.1
  Bottom 0.61: 74.73,9.01 v74.73,8.96 | 53.63,11.65 53.04,11.65 52.92,11.78 51.27,11.78 51.14,11.65 J8.2 | IC5.2 54.82,11.52 55.58,10.76 55.58,9.49 56.22,8.86 57.74,8.86 | D2.P$1 61.23,6.38 60.66,6.95 | C18.1 59.27,15.59 59.14,15.59 | 69.2,13.25 v69.2,13.28 70.21,13.28 71.03,12.46 C11.1 71.03,11.32 71.84,10.51 73.19,10.51 v74.73,8.96 | v76.03,10.48 76.03,10.25 75.7,9.92 v74.73,8.96
  Bottom 0.813: IC5.4 59.14,12.34 59.14,15.59 59.14,15.84 J7.4 | 60.66,6.95 58.58,6.95 | 59.88,10.79 59.47,10.63 C17.1 59.34,8.86 58.5,8.86 | 57.74,8.86 58.5,8.86 | 58.5,8.86 58.5,6.88 C14.1
+5V2  (via drill 0.5, 0.5 pad 0.81)
  Top 0.254: 16.74,33.84 17.48,34.58 | v15.27,31.04 15.14,30.97
  Top 0.305: IC9.6 17.49,34.58 17.48,34.58 | IC9.4 18.62,33.45 18.21,33.05 17.27,33.05 16.89,33.43 16.76,33.43 16.76,33.81 16.74,33.84 | TX2.A 30.01,34.7 | 30.01,34.7 RX2.A | v31.24,34.7 30.01,34.7 | IC9.18 11.08,29.22 11.63,29.77 12.19,29.77 12.45,29.52 v13.97,29.52
  Top 0.406: 16.76,33.43 15.27,31.93 v15.27,31.04
  Top 0.61: v20.8,26.72 23.57,26.72 24.49,25.81 v25.53,25.81 26.67,24.67 30.48,24.67 J11.4
  Bottom 0.254: v15.27,31.04 15.16,31.2 | 12.7,27.38 IC7.4 | v25.53,25.81 25.27,25.56 23.11,25.56 22.95,25.72 RP5.5 RP5.6
  Bottom 0.305: 29.34,26.95 29.34,27.77 IC8.4 | IC7.20 9.4,33.45 9.83,33.02 10.74,33.02 11.71,32.06 12.32,32.06 14.3,30.08 | C23.1 31.52,34.42 v31.24,34.7 | 13.97,29.8 v13.97,29.52 13.26,29.52 12.7,28.96 12.7,27.38 | v15.27,31.04 15.21,31.09 15.21,31.17
  Bottom 0.406: IC8.2 36.37,28.35 | 30.61,29.37 30.61,29.04 30.45,28.88 | 30.45,28.88 IC8.4 | 30.12,29.21 30.45,28.88 | 31.42,33.05 C23.1
  Bottom 0.61: 15.27,30.99 v15.27,31.04 | 36.37,28.35 36.96,28.35 37.08,28.22 38.73,28.22 38.86,28.35 J12.2 | IC8.2 35.18,28.48 34.42,29.24 34.42,30.51 33.78,31.14 32.26,31.14 | D3.P$1 28.77,33.62 29.34,33.05 | C27.1 30.73,24.41 30.86,24.41 | 20.8,26.75 v20.8,26.72 19.79,26.72 18.97,27.54 C20.1 18.97,28.68 18.16,29.49 16.82,29.49 v15.27,31.04 | v13.97,29.52 13.97,29.75 14.3,30.08 v15.27,31.04
  Bottom 0.813: IC8.4 30.86,27.66 30.86,24.41 30.86,24.16 J11.4 | 29.34,33.05 31.42,33.05 | 30.12,29.21 30.53,29.37 C26.1 30.66,31.14 31.5,31.14 | 32.26,31.14 31.5,31.14 | 31.5,31.14 31.5,33.12 C23.1
+5V3  (via drill 0.5, 0.5 pad 0.81)
  Top 0.254: 73.26,28.16 72.52,27.42 | v74.73,30.96 74.86,31.03
  Top 0.305: IC12.6 72.51,27.42 72.52,27.42 | IC12.4 71.38,28.55 71.79,28.95 72.73,28.95 73.11,28.57 73.24,28.57 73.24,28.19 73.26,28.16 | TX3.A 59.99,27.3 | 59.99,27.3 RX3.A | v58.76,27.3 59.99,27.3 | IC12.18 78.92,32.78 78.37,32.23 77.81,32.23 77.55,32.48 v76.03,32.48
  Top 0.406: 73.24,28.57 74.73,30.07 v74.73,30.96
  Top 0.61: v69.2,35.28 66.43,35.28 65.51,36.19 v64.47,36.19 63.33,37.33 59.52,37.33 J15.4
  Bottom 0.254: v74.73,30.96 74.84,30.8 | 77.3,34.62 IC10.4 | v64.47,36.19 64.73,36.44 66.89,36.44 67.05,36.28 RP7.5 RP7.6
  Bottom 0.305: 60.66,35.05 60.66,34.23 IC11.4 | IC10.20 80.59,28.55 80.17,28.98 79.26,28.98 78.29,29.94 77.68,29.94 75.7,31.92 | C32.1 58.48,27.58 v58.76,27.3 | 76.03,32.2 v76.03,32.48 76.74,32.48 77.3,33.04 77.3,34.62 | v74.73,30.96 74.78,30.91 74.78,30.83
  Bottom 0.406: IC11.2 53.63,33.65 | 59.39,32.63 59.39,32.96 59.55,33.12 | 59.55,33.12 IC11.4 | 59.88,32.79 59.55,33.12 | 58.58,28.95 C32.1
  Bottom 0.61: 74.73,31.01 v74.73,30.96 | 53.63,33.65 53.04,33.65 52.92,33.78 51.27,33.78 51.14,33.65 J16.2 | IC11.2 54.82,33.52 55.58,32.76 55.58,31.49 56.22,30.86 57.74,30.86 | D4.P$1 61.23,28.38 60.66,28.95 | C36.1 59.27,37.59 59.14,37.59 | 69.2,35.25 v69.2,35.28 70.21,35.28 71.03,34.46 C29.1 71.03,33.32 71.84,32.51 73.19,32.51 v74.73,30.96 | v76.03,32.48 76.03,32.25 75.7,31.92 v74.73,30.96
  Bottom 0.813: IC11.4 59.14,34.34 59.14,37.59 59.14,37.84 J15.4 | 60.66,28.95 58.58,28.95 | 59.88,32.79 59.47,32.63 C35.1 59.34,30.86 58.5,30.86 | 57.74,30.86 58.5,30.86 | 58.5,30.86 58.5,28.88 C32.1
+5V4  (via drill 0.5, 0.5 pad 0.81)
  Top 0.254: 16.74,55.84 17.48,56.58 | v15.27,53.04 15.14,52.97
  Top 0.305: IC15.6 17.49,56.58 17.48,56.58 | IC15.4 18.62,55.45 18.21,55.05 17.27,55.05 16.89,55.43 16.76,55.43 16.76,55.81 16.74,55.84 | TX4.A 30.01,56.7 | 30.01,56.7 RX4.A | v31.24,56.7 30.01,56.7 | IC15.18 11.08,51.22 11.63,51.77 12.19,51.77 12.45,51.52 v13.97,51.52
  Top 0.406: 16.76,55.43 15.27,53.93 v15.27,53.04
  Top 0.61: v20.8,48.72 23.57,48.72 24.49,47.81 v25.53,47.81 26.67,46.67 30.48,46.67 J19.4
  Bottom 0.254: v15.27,53.04 15.16,53.2 | 12.7,49.38 IC13.4 | v25.53,47.81 25.27,47.56 23.11,47.56 22.95,47.72 RP9.5 RP9.6
  Bottom 0.305: 29.34,48.95 29.34,49.77 IC14.4 | IC13.20 9.4,55.45 9.83,55.02 10.74,55.02 11.71,54.06 12.32,54.06 14.3,52.08 | C41.1 31.52,56.42 v31.24,56.7 | 13.97,51.8 v13.97,51.52 13.26,51.52 12.7,50.96 12.7,49.38 | v15.27,53.04 15.21,53.09 15.21,53.17
  Bottom 0.406: IC14.2 36.37,50.35 | 30.61,51.37 30.61,51.04 30.45,50.88 | 30.45,50.88 IC14.4 | 30.12,51.21 30.45,50.88 | 31.42,55.05 C41.1
  Bottom 0.61: 15.27,52.99 v15.27,53.04 | 36.37,50.35 36.96,50.35 37.08,50.22 38.73,50.22 38.86,50.35 J20.2 | IC14.2 35.18,50.48 34.42,51.24 34.42,52.51 33.78,53.14 32.26,53.14 | D5.P$1 28.77,55.62 29.34,55.05 | C45.1 30.73,46.41 30.86,46.41 | 20.8,48.75 v20.8,48.72 19.79,48.72 18.97,49.54 C38.1 18.97,50.68 18.16,51.49 16.82,51.49 v15.27,53.04 | v13.97,51.52 13.97,51.75 14.3,52.08 v15.27,53.04
  Bottom 0.813: IC14.4 30.86,49.66 30.86,46.41 30.86,46.16 J19.4 | 29.34,55.05 31.42,55.05 | 30.12,51.21 30.53,51.37 C44.1 30.66,53.14 31.5,53.14 | 32.26,53.14 31.5,53.14 | 31.5,53.14 31.5,55.12 C41.1
+5V5  (via drill 0.5, 0.5 pad 0.81)
  Top 0.254: 73.26,50.16 72.52,49.42 | v74.73,52.96 74.86,53.03
  Top 0.305: IC18.6 72.51,49.42 72.52,49.42 | IC18.4 71.38,50.55 71.79,50.95 72.73,50.95 73.11,50.57 73.24,50.57 73.24,50.19 73.26,50.16 | TX5.A 59.99,49.3 | 59.99,49.3 RX5.A | v58.76,49.3 59.99,49.3 | IC18.18 78.92,54.78 78.37,54.23 77.81,54.23 77.55,54.48 v76.03,54.48
  Top 0.406: 73.24,50.57 74.73,52.07 v74.73,52.96
  Top 0.61: v69.2,57.28 66.43,57.28 65.51,58.19 v64.47,58.19 63.33,59.33 59.52,59.33 J23.4
  Bottom 0.254: v74.73,52.96 74.84,52.8 | 77.3,56.62 IC16.4 | v64.47,58.19 64.73,58.44 66.89,58.44 67.05,58.28 RP11.5 RP11.6
  Bottom 0.305: 60.66,57.05 60.66,56.23 IC17.4 | IC16.20 80.59,50.55 80.17,50.98 79.26,50.98 78.29,51.94 77.68,51.94 75.7,53.92 | C50.1 58.48,49.58 v58.76,49.3 | 76.03,54.2 v76.03,54.48 76.74,54.48 77.3,55.04 77.3,56.62 | v74.73,52.96 74.78,52.91 74.78,52.83
  Bottom 0.406: IC17.2 53.63,55.65 | 59.39,54.63 59.39,54.96 59.55,55.12 | 59.55,55.12 IC17.4 | 59.88,54.79 59.55,55.12 | 58.58,50.95 C50.1
  Bottom 0.61: 74.73,53.01 v74.73,52.96 | 53.63,55.65 53.04,55.65 52.92,55.78 51.27,55.78 51.14,55.65 J24.2 | IC17.2 54.82,55.52 55.58,54.76 55.58,53.49 56.22,52.86 57.74,52.86 | D6.P$1 61.23,50.38 60.66,50.95 | C54.1 59.27,59.59 59.14,59.59 | 69.2,57.25 v69.2,57.28 70.21,57.28 71.03,56.46 C47.1 71.03,55.32 71.84,54.51 73.19,54.51 v74.73,52.96 | v76.03,54.48 76.03,54.25 75.7,53.92 v74.73,52.96
  Bottom 0.813: IC17.4 59.14,56.34 59.14,59.59 59.14,59.84 J23.4 | 60.66,50.95 58.58,50.95 | 59.88,54.79 59.47,54.63 C53.1 59.34,52.86 58.5,52.86 | 57.74,52.86 58.5,52.86 | 58.5,52.86 58.5,50.88 C50.1
+5V6  (via drill 0.5, 0.5 pad 0.81)
  Top 0.254: 16.74,77.84 17.48,78.58 | v15.27,75.04 15.14,74.97
  Top 0.305: IC21.6 17.49,78.58 17.48,78.58 | IC21.4 18.62,77.45 18.21,77.05 17.27,77.05 16.89,77.43 16.76,77.43 16.76,77.81 16.74,77.84 | TX6.A 30.01,78.7 | 30.01,78.7 RX6.A | v31.24,78.7 30.01,78.7 | IC21.18 11.08,73.22 11.63,73.77 12.19,73.77 12.45,73.52 v13.97,73.52
  Top 0.406: 16.76,77.43 15.27,75.93 v15.27,75.04
  Top 0.61: v20.8,70.72 23.57,70.72 24.49,69.81 v25.53,69.81 26.67,68.67 30.48,68.67 J27.4
  Bottom 0.254: v15.27,75.04 15.16,75.19 | 12.7,71.38 IC19.4 | v25.53,69.81 25.27,69.56 23.11,69.56 22.95,69.72 RP13.5 RP13.6
  Bottom 0.305: 29.34,70.95 29.34,71.77 IC20.4 | IC19.20 9.4,77.45 9.83,77.02 10.74,77.02 11.71,76.06 12.32,76.06 14.3,74.08 | C59.1 31.52,78.42 v31.24,78.7 | 13.97,73.8 v13.97,73.52 13.26,73.52 12.7,72.96 12.7,71.38 | v15.27,75.04 15.21,75.09 15.21,75.17
  Bottom 0.406: IC20.2 36.37,72.35 | 30.61,73.37 30.61,73.04 30.45,72.88 | 30.45,72.88 IC20.4 | 30.12,73.21 30.45,72.88 | 31.42,77.05 C59.1
  Bottom 0.61: 15.27,74.99 v15.27,75.04 | 36.37,72.35 36.96,72.35 37.08,72.22 38.73,72.22 38.86,72.35 J28.2 | IC20.2 35.18,72.48 34.42,73.24 34.42,74.51 33.78,75.14 32.26,75.14 | D7.P$1 28.77,77.62 29.34,77.05 | C63.1 30.73,68.41 30.86,68.41 | 20.8,70.75 v20.8,70.72 19.79,70.72 18.97,71.54 C56.1 18.97,72.68 18.16,73.49 16.82,73.49 v15.27,75.04 | v13.97,73.52 13.97,73.75 14.3,74.08 v15.27,75.04
  Bottom 0.813: IC20.4 30.86,71.66 30.86,68.41 30.86,68.16 J27.4 | 29.34,77.05 31.42,77.05 | 30.12,73.21 30.53,73.37 C62.1 30.66,75.14 31.5,75.14 | 32.26,75.14 31.5,75.14 | 31.5,75.14 31.5,77.12 C59.1
+5V7  (via drill 0.5, 0.5 pad 0.81)
  Top 0.254: 73.26,72.16 72.52,71.42 | v74.73,74.96 74.86,75.03
  Top 0.305: IC24.6 72.51,71.42 72.52,71.42 | IC24.4 71.38,72.55 71.79,72.95 72.73,72.95 73.11,72.57 73.24,72.57 73.24,72.19 73.26,72.16 | TX7.A 59.99,71.3 | 59.99,71.3 RX7.A | v58.76,71.3 59.99,71.3 | IC24.18 78.92,76.78 78.37,76.23 77.81,76.23 77.55,76.48 v76.03,76.48
  Top 0.406: 73.24,72.57 74.73,74.07 v74.73,74.96
  Top 0.61: v69.2,79.28 66.43,79.28 65.51,80.19 v64.47,80.19 63.33,81.33 59.52,81.33 J31.4
  Bottom 0.254: v74.73,74.96 74.84,74.81 | 77.3,78.62 IC22.4 | v64.47,80.19 64.73,80.44 66.89,80.44 67.05,80.28 RP15.5 RP15.6
  Bottom 0.305: 60.66,79.05 60.66,78.23 IC23.4 | IC22.20 80.59,72.55 80.17,72.98 79.26,72.98 78.29,73.94 77.68,73.94 75.7,75.92 | C68.1 58.48,71.58 v58.76,71.3 | 76.03,76.2 v76.03,76.48 76.74,76.48 77.3,77.04 77.3,78.62 | v74.73,74.96 74.78,74.91 74.78,74.83
  Bottom 0.406: IC23.2 53.63,77.65 | 59.39,76.63 59.39,76.96 59.55,77.12 | 59.55,77.12 IC23.4 | 59.88,76.79 59.55,77.12 | 58.58,72.95 C68.1
  Bottom 0.61: 74.73,75.01 v74.73,74.96 | 53.63,77.65 53.04,77.65 52.92,77.78 51.27,77.78 51.14,77.65 J32.2 | IC23.2 54.82,77.52 55.58,76.76 55.58,75.49 56.22,74.86 57.74,74.86 | D8.P$1 61.23,72.38 60.66,72.95 | C72.1 59.27,81.59 59.14,81.59 | 69.2,79.25 v69.2,79.28 70.21,79.28 71.03,78.46 C65.1 71.03,77.32 71.84,76.51 73.19,76.51 v74.73,74.96 | v76.03,76.48 76.03,76.25 75.7,75.92 v74.73,74.96
  Bottom 0.813: IC23.4 59.14,78.34 59.14,81.59 59.14,81.84 J31.4 | 60.66,72.95 58.58,72.95 | 59.88,76.79 59.47,76.63 C71.1 59.34,74.86 58.5,74.86 | 57.74,74.86 58.5,74.86 | 58.5,74.86 58.5,72.88 C68.1
A0
  Top 0.254: 13.99,4.55 11.99,2.54 11.58,2.54 11.43,2.39 J2.12 | 13.99,4.55 14.1,4.65 | IC3.23 13.98,4.55 13.99,4.55
A1
  Top 0.254: J2.11 13.97,3.4 14.44,3.87 IC3.24
A2
  Top 0.254: 16.57,3.88 IC3.25 16.51,3.79 J2.10
A3
  Top 0.254: J2.9 19.05,2.54 16.93,4.67 16.93,4.63 IC3.26
A4
  Top 0.254: J2.8 21.59,2.34 21.39,2.54 20.22,2.54 17.51,5.25 17.51,5.17 IC3.27
A5
  Top 0.254: 18.06,5.79 18.34,5.51 | 18.34,5.51 20.85,3 23.72,3 24.13,2.59 J2.7 | IC3.28 18.31,5.51 18.34,5.51
A6  (via drill 0.5 pad 0.81)
  Top 0.254: 11.84,6.88 11.79,6.88 11.4,6.5 | 11.4,6.5 9.04,4.14 v9.04,3.05 | IC3.19 11.41,6.5 11.4,6.5
  Bottom 0.254: J2.6 26.29,1.65 25.78,1.65 24.94,2.49 9.65,2.49 v9.04,3.05
A7  (via drill 0.5 pad 0.81)
  Top 0.254: v11.73,3.43 11.73,3.4 13.31,4.98 | 13.53,5.2 13.31,4.98 | IC3.22 13.31,4.98
  Bottom 0.254: J2.5 27.94,2.54 26.16,2.54 25.76,2.95 12.22,2.95 v11.73,3.43
A8
  Top 0.254: J7.9 70.95,15.46 73.08,13.34 73.08,13.37 IC6.26
A9
  Top 0.254: 73.43,14.12 IC6.25 73.49,14.21 J7.10
A10
  Top 0.254: J7.11 76.03,14.6 75.56,14.13 IC6.24
A11
  Top 0.254: 76,13.45 78.01,15.46 78.42,15.46 78.57,15.61 J7.12 | 76,13.45 75.9,13.35 | IC6.23 76.02,13.45 76,13.45
A12
  Top 0.254: J7.8 68.41,15.66 68.61,15.46 69.78,15.46 72.49,12.75 72.49,12.83 IC6.27
A13
  Top 0.254: 71.94,12.21 71.66,12.49 | 71.66,12.49 69.15,15 66.28,15 65.87,15.41 J7.7 | IC6.28 71.69,12.49 71.66,12.49
A14  (via drill 0.5 pad 0.81)
  Top 0.254: 78.16,11.12 78.21,11.12 78.59,11.5 | 78.59,11.5 80.96,13.86 v80.96,14.95 | IC6.19 78.59,11.5
  Bottom 0.254: J7.6 63.71,16.35 64.22,16.35 65.06,15.51 80.35,15.51 v80.96,14.95
A15  (via drill 0.5 pad 0.81)
  Top 0.254: v78.27,14.57 78.27,14.6 76.69,13.02 | 76.47,12.8 76.69,13.02 | IC6.22 76.69,13.02
  Bottom 0.254: J7.5 62.06,15.46 63.84,15.46 64.24,15.05 77.78,15.05 v78.27,14.57
A16
  Top 0.254: J11.9 19.05,24.54 16.93,26.66 16.93,26.63 IC9.26
A17
  Top 0.254: 16.57,25.88 IC9.25 16.51,25.79 J11.10
A18
  Top 0.254: J11.11 13.97,25.4 14.44,25.87 IC9.24
A19
  Top 0.254: 13.99,26.55 11.99,24.54 11.58,24.54 11.43,24.39 J11.12 | 13.99,26.55 14.1,26.65 | IC9.23 13.98,26.55 13.99,26.55
A20
  Top 0.254: J11.8 21.59,24.34 21.39,24.54 20.22,24.54 17.51,27.25 17.51,27.17 IC9.27
A21
  Top 0.254: 18.06,27.79 18.34,27.51 | 18.34,27.51 20.85,25 23.72,25 24.13,24.59 J11.7 | IC9.28 18.31,27.51 18.34,27.51
A22  (via drill 0.5 pad 0.81)
  Top 0.254: 11.84,28.89 11.79,28.89 11.4,28.5 | 11.4,28.5 9.04,26.14 v9.04,25.05 | IC9.19 11.41,28.5 11.4,28.5
  Bottom 0.254: J11.6 26.29,23.65 25.78,23.65 24.94,24.49 9.65,24.49 v9.04,25.05
A23  (via drill 0.5 pad 0.81)
  Top 0.254: v11.73,25.43 11.73,25.4 13.31,26.98 | 13.53,27.2 13.31,26.98 | IC9.22 13.31,26.98
  Bottom 0.254: J11.5 27.94,24.54 26.16,24.54 25.76,24.95 12.22,24.95 v11.73,25.43
A24
  Top 0.254: J15.9 70.95,37.46 73.08,35.34 73.08,35.37 IC12.26
A25
  Top 0.254: 73.43,36.12 IC12.25 73.49,36.22 J15.10
A26
  Top 0.254: J15.11 76.03,36.6 75.56,36.13 IC12.24
A27
  Top 0.254: 76,35.45 78.01,37.46 78.42,37.46 78.57,37.61 J15.12 | 76,35.45 75.9,35.35 | IC12.23 76.02,35.45 76,35.45
A28
  Top 0.254: J15.8 68.41,37.66 68.61,37.46 69.78,37.46 72.49,34.75 72.49,34.83 IC12.27
A29
  Top 0.254: 71.94,34.21 71.66,34.49 | 71.66,34.49 69.15,37 66.28,37 65.87,37.41 J15.7 | IC12.28 71.69,34.49 71.66,34.49
A30  (via drill 0.5 pad 0.81)
  Top 0.254: 78.16,33.12 78.21,33.12 78.59,33.5 | 78.59,33.5 80.96,35.86 v80.96,36.95 | IC12.19 78.59,33.5
  Bottom 0.254: J15.6 63.71,38.35 64.22,38.35 65.06,37.51 80.35,37.51 v80.96,36.95
A31  (via drill 0.5 pad 0.81)
  Top 0.254: v78.27,36.57 78.27,36.6 76.69,35.02 | 76.47,34.8 76.69,35.02 | IC12.22 76.69,35.02
  Bottom 0.254: J15.5 62.06,37.46 63.84,37.46 64.24,37.05 77.78,37.05 v78.27,36.57
A32
  Top 0.254: J19.9 19.05,46.54 16.93,48.66 16.93,48.63 IC15.26
A33
  Top 0.254: 16.57,47.88 IC15.25 16.51,47.78 J19.10
A34
  Top 0.254: J19.11 13.97,47.4 14.44,47.87 IC15.24
A35
  Top 0.254: 13.99,48.55 11.99,46.54 11.58,46.54 11.43,46.39 J19.12 | 13.99,48.55 14.1,48.65 | IC15.23 13.98,48.55 13.99,48.55
A36
  Top 0.254: J19.8 21.59,46.34 21.39,46.54 20.22,46.54 17.51,49.25 17.51,49.17 IC15.27
A37
  Top 0.254: 18.06,49.79 18.34,49.51 | 18.34,49.51 20.85,47 23.72,47 24.13,46.59 J19.7 | IC15.28 18.31,49.51 18.34,49.51
A38  (via drill 0.5 pad 0.81)
  Top 0.254: 11.84,50.88 11.79,50.88 11.4,50.5 | 11.4,50.5 9.04,48.14 v9.04,47.05 | IC15.19 11.41,50.5 11.4,50.5
  Bottom 0.254: J19.6 26.29,45.65 25.78,45.65 24.94,46.49 9.65,46.49 v9.04,47.05
A39  (via drill 0.5 pad 0.81)
  Top 0.254: v11.73,47.43 11.73,47.4 13.31,48.98 | 13.53,49.2 13.31,48.98 | IC15.22 13.31,48.98
  Bottom 0.254: J19.5 27.94,46.54 26.16,46.54 25.76,46.95 12.22,46.95 v11.73,47.43
A40
  Top 0.254: J23.9 70.95,59.46 73.08,57.34 73.08,57.37 IC18.26
A41
  Top 0.254: 73.43,58.12 IC18.25 73.49,58.22 J23.10
A42
  Top 0.254: J23.11 76.03,58.6 75.56,58.13 IC18.24
A43
  Top 0.254: 76,57.45 78.01,59.46 78.42,59.46 78.57,59.61 J23.12 | 76,57.45 75.9,57.35 | IC18.23 76.02,57.45 76,57.45
A44
  Top 0.254: J23.8 68.41,59.66 68.61,59.46 69.78,59.46 72.49,56.75 72.49,56.83 IC18.27
A45
  Top 0.254: 71.94,56.21 71.66,56.49 | 71.66,56.49 69.15,59 66.28,59 65.87,59.41 J23.7 | IC18.28 71.69,56.49 71.66,56.49
A46  (via drill 0.5 pad 0.81)
  Top 0.254: 78.16,55.12 78.21,55.12 78.59,55.5 | 78.59,55.5 80.96,57.86 v80.96,58.95 | IC18.19 78.59,55.5
  Bottom 0.254: J23.6 63.71,60.35 64.22,60.35 65.06,59.51 80.35,59.51 v80.96,58.95
A47  (via drill 0.5 pad 0.81)
  Top 0.254: v78.27,58.57 78.27,58.6 76.69,57.02 | 76.47,56.8 76.69,57.02 | IC18.22 76.69,57.02
  Bottom 0.254: J23.5 62.06,59.46 63.84,59.46 64.24,59.05 77.78,59.05 v78.27,58.57
A48
  Top 0.254: J27.9 19.05,68.54 16.93,70.67 16.93,70.63 IC21.26
A49
  Top 0.254: 16.57,69.88 IC21.25 16.51,69.78 J27.10
A50
  Top 0.254: J27.11 13.97,69.4 14.44,69.87 IC21.24
A51
  Top 0.254: 13.99,70.55 11.99,68.54 11.58,68.54 11.43,68.39 J27.12 | 13.99,70.55 14.1,70.65 | IC21.23 13.98,70.55 13.99,70.55
A52
  Top 0.254: J27.8 21.59,68.34 21.39,68.54 20.22,68.54 17.51,71.25 17.51,71.17 IC21.27
A53
  Top 0.254: 18.06,71.79 18.34,71.51 | 18.34,71.51 20.85,69 23.72,69 24.13,68.59 J27.7 | IC21.28 18.31,71.51 18.34,71.51
A54  (via drill 0.5 pad 0.81)
  Top 0.254: 11.84,72.89 11.79,72.89 11.4,72.5 | 11.4,72.5 9.04,70.14 v9.04,69.05 | IC21.19 11.41,72.5 11.4,72.5
  Bottom 0.254: J27.6 26.29,67.65 25.78,67.65 24.94,68.49 9.65,68.49 v9.04,69.05
A55  (via drill 0.5 pad 0.81)
  Top 0.254: v11.73,69.43 11.73,69.4 13.31,70.98 | 13.53,71.2 13.31,70.98 | IC21.22 13.31,70.98
  Bottom 0.254: J27.5 27.94,68.54 26.16,68.54 25.76,68.95 12.22,68.95 v11.73,69.43
A56
  Top 0.254: J31.9 70.95,81.46 73.08,79.33 73.08,79.37 IC24.26
A57
  Top 0.254: 73.43,80.12 IC24.25 73.49,80.22 J31.10
A58
  Top 0.254: J31.11 76.03,80.6 75.56,80.13 IC24.24
A59
  Top 0.254: 76,79.45 78.01,81.46 78.42,81.46 78.57,81.61 J31.12 | 76,79.45 75.9,79.35 | IC24.23 76.02,79.45 76,79.45
A60
  Top 0.254: J31.8 68.41,81.66 68.61,81.46 69.78,81.46 72.49,78.75 72.49,78.83 IC24.27
A61